# EAGLE board v0.0 (EAGLE 5.11)
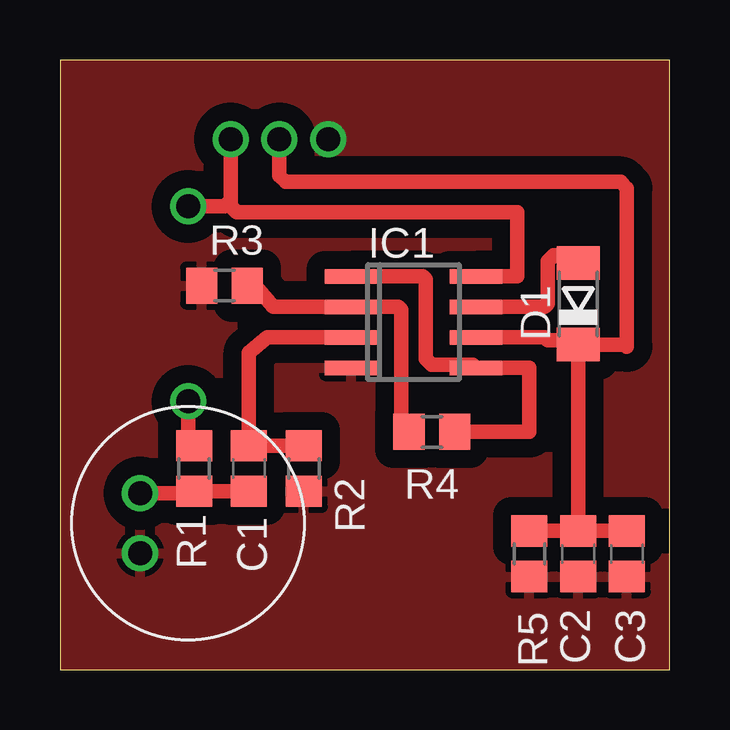
[diagram p0: board, top side]
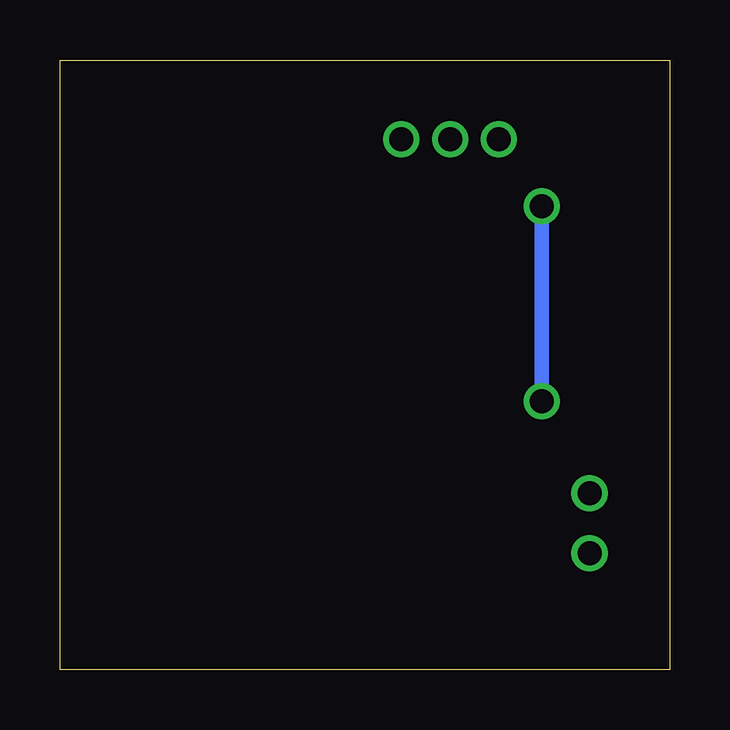
[diagram p1: board, bottom side, seen from below]

Size 25.4 x 25.4 mm. Coordinates in mm from the lower left corner, seen from the top.
Outline: 0,0 25.4,0 25.4,25.4 0,25.4 0,0
Copper layers (1*16): Top 0.035mm / dielectric 1.5mm / Bottom 0.035mm
Design rules "default *": minimum track width 10mil, minimum drill 24mil, track to track 30mil, track to pad 30mil, pad to pad 30mil, via to via 30mil, smd to smd 30mil, copper to edge 1mil, drill to drill 1mil, minimum pad ring 10mil, minimum via ring 8mil, stop-mask expansion 4mil, vias tented up to drill 0mil, thermal gap 10mil

## Footprints (pad centres in the part's own frame; a part is rotated, then mirrored left to right if it is on the bottom)
C0805 = smd 1.3 x 1.5: 1 -0.95,0; 2 0.95,0
SOD80C = smd 1.4 x 1.8: A 1.7,0; C -1.7,0
SO08 = smd 0.6 x 2.2: 1 -1.905,-2.6; 2 -0.635,-2.6; 3 0.635,-2.6; 4 1.905,-2.6; 5 1.905,2.6; 6 0.635,2.6; 7 -0.635,2.6; 8 -1.905,2.6
CMA-4544PF-W = drill 1 round: 1 2,1.25; 2 2,-1.25
R0805 = smd 1.3 x 1.5: 1 -0.95,0; 2 0.95,0

## Placement (x,y rotation side)
C1  0.1u  [C0805]  7.87,8.38 90 top
C2  0.1u  [C0805]  21.59,4.83 270 top
C3  0.1u  [C0805]  23.62,4.83 270 top
D1  [SOD80C]  21.59,15.24 90 top
IC1  LM358D  [SO08]  14.73,14.48 270 top
MIC1  CMA-4544PF-W  [CMA-4544PF-W]  5.33,6.1 180 top
R1  10k  [R0805]  5.59,8.38 90 top
R2  10k  [R0805]  10.16,8.38 90 top
R3  2.2k  [R0805]  6.86,16 0 top
R4  220k  [R0805]  15.49,9.91 180 top
R5  100k  [R0805]  19.56,4.83 270 top

## Library data of the parts
C1-C3 R1-R5 = rcl
D1 = diode
IC1 = linear
MIC1 = Alan Rosenthal

## Nets
+5V: IC1.8 R1.2
N$1: C1.1 MIC1.2 R1.1
N$2: C1.2 IC1.3 R2.2
N$3: IC1.2 R3.2 R4.2
N$4: IC1.1 IC1.5 R4.1
N$7: D1.A IC1.7
PE: C2.2 C3.2 IC1.4 MIC1.1 R2.1 R3.1 R5.2
VOUT: C2.1 C3.1 D1.C IC1.6 R5.1

## Tracks (layer width: path | path; a pad name or v marks a point on that pad's centre or on a via)
+5V  (via drill 1)
  Top 0.61: 7.11,19.56 7.11,19.3 7.37,19.05 19.05,19.05 19.05,16.38 IC1.8 | 7.11,19.56 v7.11,22.1 | v5.33,19.3 6.86,19.3 7.11,19.56 | v5.33,11.18 5.33,9.59 R1.2
  Bottom 0.61: v5.33,11.18 v5.33,19.3
N$1
  Top 0.61: MIC1.2 5.84,7.35 R1.1 C1.1
N$2
  Top 0.61: R2.2 C1.2 7.87,13.21 8.64,13.84 IC1.3
N$3
  Top 0.61: R3.2 8.13,16 8.89,15.11 IC1.2 14.1,15.11 14.22,14.99 14.22,9.97 R4.2
N$4
  Top 0.61: R4.1 19.56,9.91 19.56,12.57 IC1.5 17.2,12.7 15.49,12.7 15.24,12.95 15.24,16.26 15.11,16.38 IC1.1
N$7
  Top 0.61: IC1.7 20.19,15.11 20.32,15.24 20.32,17.02 20.57,17.27 21.26,17.27 D1.A
PE  (via drill 1)
  other vias: 11.18,22.1
  pour Top: -2.29,-0.25 26.42,-0.25 26.42,26.92 -2.03,26.92 -2.03,0.25
VOUT  (via drill 1)
  Top 0.61: IC1.6 20.19,13.84 20.32,13.72 21.41,13.72 D1.C | C2.1 D1.C | R5.1 C2.1 | C2.1 C3.1 | v9.14,22.1 9.14,20.57 9.4,20.32 23.37,20.32 23.62,20.07 23.62,13.46 23.54,13.54 D1.C